# Altium PCB Current_Amplifier_PCB.PcbDoc
Units mm, origin at the board's own origin, x right, y up, seen from the top; angles counter-clockwise.
Board outline 34 x 20.7 mm, 2 copper layers (Top Layer, Bottom Layer); 7 components, 19 nets, 49 pads, 3 vias.
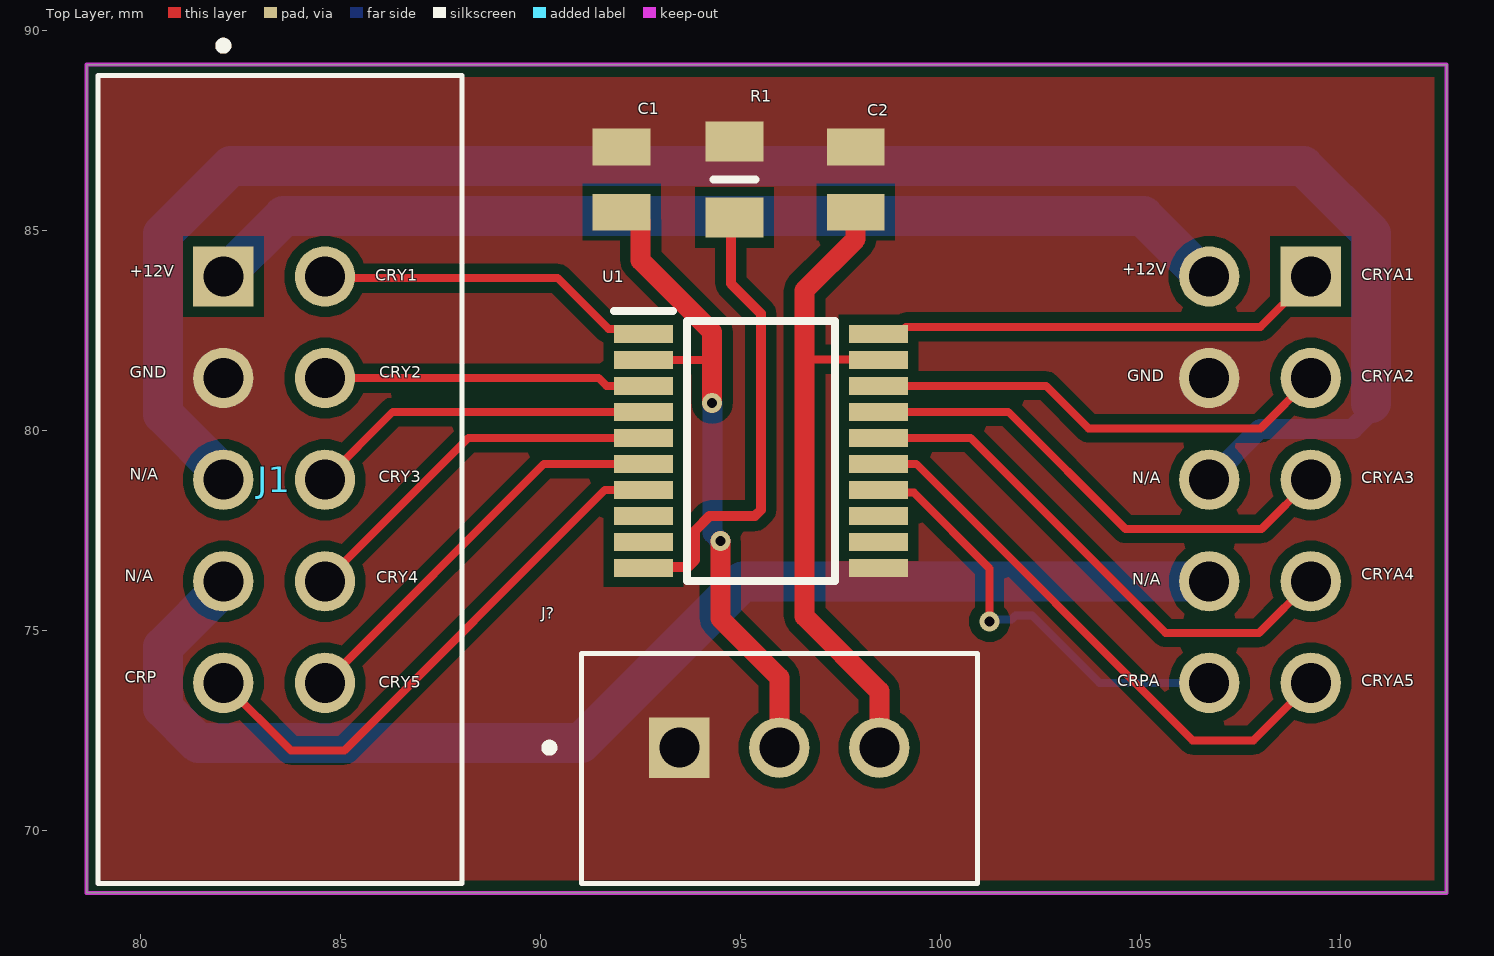
[diagram p0: Top Layer view]
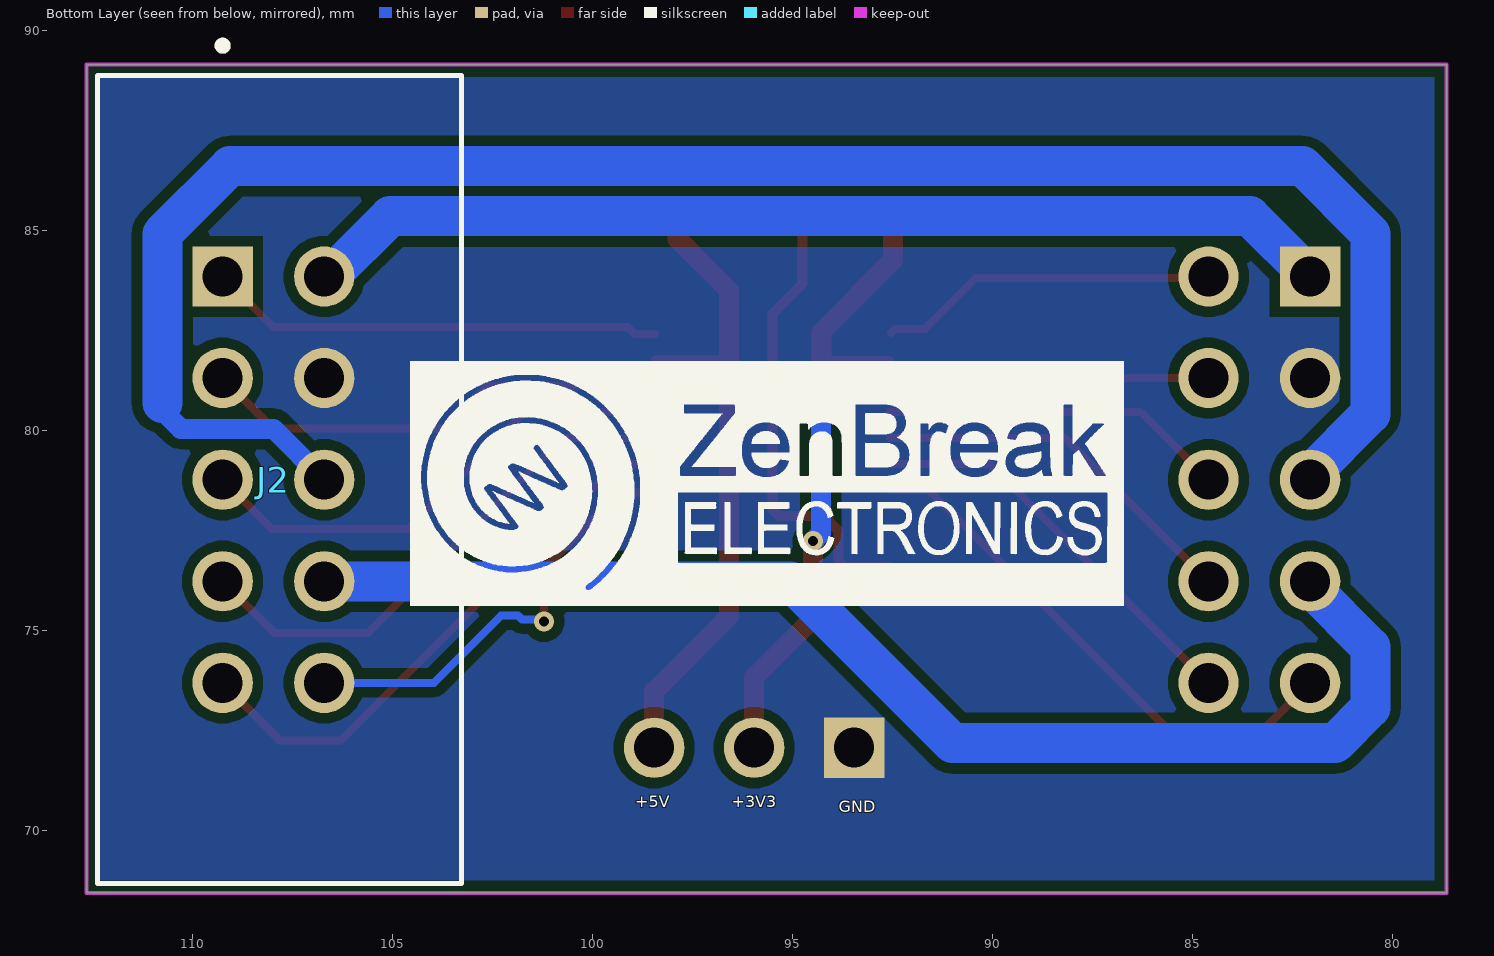
[diagram p1: Bottom Layer view, seen from below]
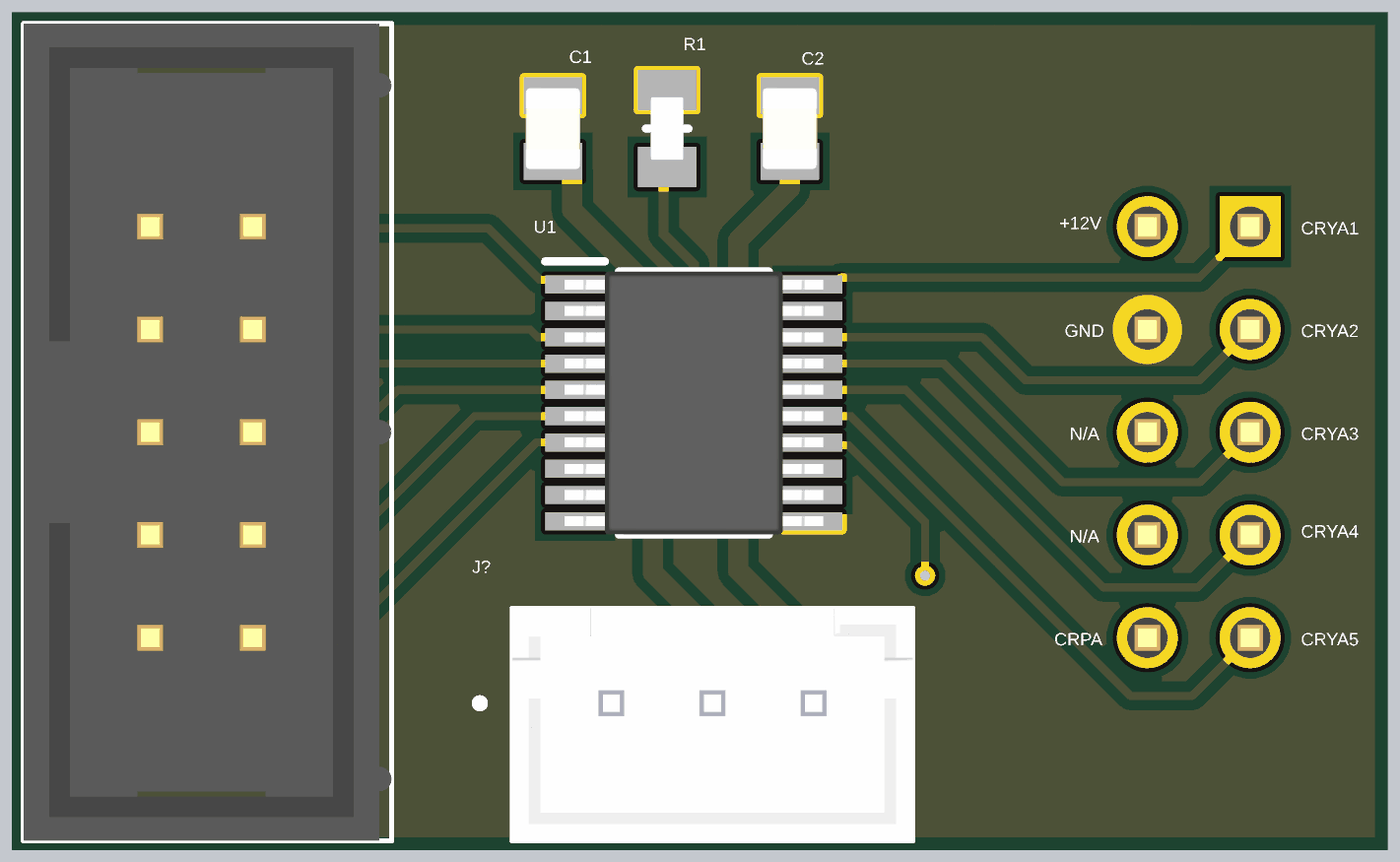
[diagram p2: 3D render of the assembled board from above, using the file's embedded part models]

## Layer stack, top to bottom
Top Solder: solder mask 0.0102, Solder Resist, Dk 3.5
Top Layer: signal copper 0.0356
Dielectric 1: dielectric 0.32, FR-4, Dk 4.8
Bottom Layer: signal copper 0.0356
Bottom Solder: solder mask 0.0102, Solder Resist, Dk 3.5

## Board outline
78.649,68.453 112.649,68.453 112.649,89.154 78.649,89.154

## Design rules (kind name [scope] priority, off if disabled: settings)
Clearance [All] p1: gap=0.254 ignorepadtopadclearanceinfootprint=TRUE except(0: Arc-Hole Track-Hole SMDPad-Hole THPad-Hole Via-Hole Fill-Hole Poly-Hole Region-Hole Text-Hole; 0.127: Arc-Text Track-Text SMDPad-Text THPad-Text Via-Text Fill-Text Poly-Text Region-Text Text-Text)
MinimumSolderMaskSliver [All] p1: minsoldermaskwidth=0.2
PolygonConnect [All] p1: connectstyle=Direct reliefconductorwidth=0.254 reliefentries=4 polygonreliefangle="90 Angle" airgapwidth=0.254
RoutingVias [All] p1: holewidth=0.711 width=1.27 viastyle="Through Hole" minholewidth=0.15 minwidth=0.25 maxholewidth=0.711 maxwidth=1.27
SilkToSilkClearance [All] p1: silktosilkclearance=0.127
SilkToSolderMaskClearance [IsPad] p1: minsilkscreentomaskgap=0.127 clearancetoexposedcopper=TRUE
SolderMaskExpansion [All] p1: expansion=0.102 istentingtop=FALSE
Width [All] p1: maxlimit=1 minlimit=0.127 preferedwidth=0.2 minimp=50.000000 maximp=50.000000 favimp=50.000000
27 further rules are at their usual default settings.

## Components (designator, comment, footprint, x,y, rotation, side; value= is the part's Value field where it differs from the comment)
C1 "0.1uF" CAPC2013X140N 92.022,86.284 r90 top
C2 "0.1uF" CAPC2013X140N 97.875,86.284 r90 top
J1 "SBH11-PBPC-D05-ST-BK" SULLINS_SBH11-PBPC-D05-ST-BK 83.335,78.78 r270 top
J2 "SBH11-PBPC-D05-ST-BK" SULLINS_SBH11-PBPC-D05-ST-BK 107.981,78.78 r270 bottom locked
J? "B3B-XH-A(LF)(SN)" JST_B3B-XH-A(LF)(SN) 95.964,71.555 r180 top locked
R1 "100" RESC2012X65N 94.844,86.284 r90 top
U1 "TXS0108EPWR" SOP65P640X120-20N 95.504,79.502 r0 top

## Footprints (in the part's own frame and the unit in brackets; to place one, negate y for a bottom-side part, rotate by r counter-clockwise, add the part's x,y. Pads: shape width x height; smd on the part's side, far side on the other; paste and mask are expansions set on the pad)
CAPC2013X140N [mil]
  rect 36x57 smd: 1(-32,0) 2(32,0)
  body extent -40,-27 40,27, height 49
JST_B3B-XH-A(LF)(SN) [mm]
  rect 1.508x1.508 / inner round 1.508 / far side rect 1.508x1.508 hole 1: 1(2.5,-0.525)
  round 1.508 hole 1: 2(0,-0.525) 3(-2.5,-0.525)
  silkscreen extent -4.95,-2.88 5.85,2.88, body extent -4.95,-2.88 4.95,2.88, height 7
RESC2012X65N [mm]
  rect 1x1.45 smd: 1(-0.95,0) 2(0.95,0)
  silkscreen extent 0,-0.53 0,0.53, body extent -0.77,-0.4 0.77,0.4, height 0.46
SOP65P640X120-20N [mm]
  rect 1.475x0.45 smd: 1(-2.938,2.925) 2(-2.938,2.275) 3(-2.938,1.625) 4(-2.938,0.975) 5(-2.938,0.325) 6(-2.938,-0.325) 7(-2.938,-0.975) 8(-2.938,-1.625) 9(-2.938,-2.275) 10(-2.938,-2.925) 11(2.938,-2.925) 12(2.938,-2.275) 13(2.938,-1.625) 14(2.938,-0.975) 15(2.938,-0.325) 16(2.938,0.325) 17(2.938,0.975) 18(2.938,1.625) 19(2.938,2.275) 20(2.938,2.925)
  silkscreen extent -3.67,-3.25 1.85,3.5, body extent -3.2,-3.25 3.2,3.25, height 1.13
SULLINS_SBH11-PBPC-D05-ST-BK [mm]
  rect 1.508x1.508 / inner round 1.508 / far side rect 1.508x1.508 hole 1: 1(-5.08,-1.27)
  round 1.508 hole 1: 2(-5.08,1.27) 3(-2.54,-1.27) 4(-2.54,1.27) 5(0,-1.27) 6(0,1.27) 7(2.54,-1.27) 8(2.54,1.27) 9(5.08,-1.27) 10(5.08,1.27)
  silkscreen extent -10.95,-4.4 10.1,4.7, body extent -10.1,-4.39 10.1,4.7, height 9.09

## Part data
C1 C2: library part 08053C474JAT2A, "Capacitor", Manufacturer_Name="Kyocera AVX", Mouser Part Number=581-08053C474JAT2A, Manufacturer_Part_Number=08053C474JAT2A, Mouser Price/Stock=https://www.mouser.co.uk/ProductDetail/KYOCERA-AVX/08053C474JAT2A?qs=bb%252B1MDm7h6L8wnHciIrwGg%3D%3D
J1 J2: "10 Position Total Dual Row 2.54 mm Pitch Straight Male Shrouded Box Header", Package=None, Check_prices=https://www.snapeda.com/parts/SBH11-PBPC-D05-ST-BK/Sullins+Connector+Solutions/view-part/?ref=eda, MF="Sullins Connector", MP=SBH11-PBPC-D05-ST-BK, SnapEDA_Link=https://www.snapeda.com/parts/SBH11-PBPC-D05-ST-BK/Sullins+Connector+Solutions/view-part/?ref=snap
J?: "Connector Header Through Hole 3 position 0.098 (2.50mm)", Package=None, Check_prices=https://www.snapeda.com/parts/B3B-XH-A(LF)(SN)/JST+Sales+America+Inc./view-part/?ref=eda, MF="JST Sales", MP=B3B-XH-A(LF)(SN), SnapEDA_Link=https://www.snapeda.com/parts/B3B-XH-A(LF)(SN)/JST+Sales+America+Inc./view-part/?ref=snap
R1: library part CPF0805B102RE1, "Resistor", Manufacturer_Name="TE Connectivity", Datasheet Link=http://docs-europe.electrocomponents.com/webdocs/13d1/0900766b813d116f.pdf, Height=0.65mm, Manufacturer_Part_Number=CPF0805B102RE1
U1: "8-bit bidirectional voltage-level shifter for open-drain and push-pull application", Package="TSSOP-20 Texas Instruments", Availability="In Stock", Check_prices=https://www.snapeda.com/parts/TXS0108EPWR/Texas+Instruments/view-part/?ref=eda, MF="Texas Instruments", MP=TXS0108EPWR, Price=None, Purchase-URL=https://pricing.snapeda.com/search/part/TXS0108EPWR/?ref=eda, SnapEDA_Link=https://www.snapeda.com/parts/TXS0108EPWR/Texas+Instruments/view-part/?ref=snap

## Via types
v1: diameter 0.5, hole 0.25, Top Layer to Bottom Layer, 3 vias

## Nets (pads, with @x,y where several pads share a name; then routed paths per layer and width w, separated by ;. In a path a pad name is that pad's centre, name@x,y a point inside that pad or via, vN(x,y) a via of type N, cw(c..) or ccw(c..) an arc to the next point about the centre after c; other vN are vias at no path point)
+3v3: C1.1 J?.2 U1.2 | length 16.9
  Top Layer w0.2: U1.2 94.27,81.777
  Top Layer w0.5: C1.1@92.022,85.547 92.213,85.547 92.496,85.264 92.496,84.264 94.285,82.475 v1(94.285,80.693) ; v1(94.488,77.244) 94.488,75.311 95.964,73.835 J?.2
  Bottom Layer w0.5: v1@94.294,80.712 94.294,77.438 v1(94.488,77.244)
+5: C2.1 J?.3 U1.19 | length 16.7
  Top Layer w0.2: 96.594,81.862 96.669,81.788 U1.19@98.442,81.788
  Top Layer w0.5: C2.1@97.875,85.547 97.875,84.794 96.594,83.513 96.594,81.862 96.594,75.364 98.464,73.494 J?.3
+12: J1.1 J2.2 | length 25.9
  Bottom Layer w1: J1.1 83.573,85.368 105.066,85.368 106.574,83.86 J2.2
CRP: J1.9 U1.7 | length 13.9
  Top Layer w0.2: J1.9 83.755,72.009 85.09,72.009 91.608,78.527 U1.7
CRPA: J2.10 U1.14 | length 11.2
  Top Layer w0.2: U1.14 98.513,78.456 99.326,78.456 101.219,76.563 v1(101.219,75.236)
  Bottom Layer w0.2: v1(101.219,75.236) 101.269,75.286 101.769,75.286 101.869,75.386 102.287,75.386 103.973,73.7 J2.10
CRY1: J1.2 U1.1 | length 8.5
  Top Layer w0.2: J1.2 84.644,83.82 90.424,83.82 91.698,82.546 92.447,82.546 U1.1@92.547,82.447
CRY2: J1.4 U1.3 | length 8
  Top Layer w0.2: J1.4 91.449,81.32 91.642,81.127 U1.3
CRY3: J1.6 U1.4 | length 8.7
  Top Layer w0.2: J1.6 86.302,80.477 U1.4
CRY4: J1.8 U1.5 | length 9.4
  Top Layer w0.2: J1.8 88.192,79.827 U1.5
CRY5: J1.10 U1.6 | length 10.2
  Top Layer w0.2: J1.10 90.082,79.177 U1.6
CRYA1: J2.1 U1.20 | length 11.4
  Top Layer w0.2: U1.20 98.955,82.427 99.128,82.601 107.992,82.601 J2.1
CRYA2: J2.3 U1.18 | length 11.8
  Top Layer w0.2: U1.18 102.632,81.127 103.698,80.061 107.992,80.061 J2.3
CRYA3: J2.5 U1.17 | length 12.5
  Top Layer w0.2: U1.17 101.687,80.477 104.618,77.546 108.018,77.546 J2.5
CRYA4: J2.7 U1.16 | length 13.4
  Top Layer w0.2: U1.16 100.742,79.827 105.623,74.946 107.958,74.946 J2.7
CRYA5: J2.9 U1.15 | length 14.3
  Top Layer w0.2: U1.15 99.385,79.177 106.299,72.263 107.815,72.263 J2.9
GND: C1.2 C2.2 J1.3 J2.4 J?.1 R1.2 U1.11
LRP: J1.5 J2.6 | length 47.3
  Bottom Layer w0.5: J2.6 107.981,80.05 110.301,80.05 110.693,80.442
  Bottom Layer w1: J1.5 82.065,78.917 80.557,80.425 80.557,84.926 82.252,86.622 109.064,86.622 110.759,84.926 110.759,80.695
N: J1.7 J2.8 | length 32
  Bottom Layer w1: J1.7 82.065,76.102 80.557,74.594 80.557,73.075 81.44,72.192 91.002,72.192 95.049,76.24 J2.8
NetR1_1: R1.1 U1.10 | length 11.3
  Top Layer w0.254: U1.10@92.574,76.596 93.685,76.596 93.857,76.769 93.857,77.505 94.227,77.875 95.355,77.875 95.504,78.024 95.504,82.931 94.754,83.681 R1.1@94.754,85.057
pads on no net: U1.8 U1.9 U1.12 U1.13

## Polygon pours and split planes (outlines as drawn)
GND on Bottom Layer "NONET_L-01_P-001" (solid, pour order 0): 112.598,89.129 112.649,89.078 112.649,68.504 78.715,68.504 78.715,89.103
GND on Top Layer "NONET_L-01_P-001" (solid, pour order 1): 112.598,89.129 112.598,68.504 112.573,68.529 78.715,68.529 78.715,89.103

## Keep-outs
Keep-Out Layer:
  the board outline again, w0.1

## Silkscreen, mask and mechanical layers (free items; w line width, h text height)
Top Overlay:
  text "+12V" at 104.538,83.797 h0.5
  text "+12V" at 79.726,83.757 h0.5
  text "CRY1" at 85.868,83.656 h0.5
  text "CRYA1" at 110.507,83.67 h0.5
  text "GND" at 79.726,81.223 h0.5
  text "CRY2" at 85.962,81.228 h0.5
  text "GND" at 104.665,81.136 h0.5
  text "CRYA2" at 110.507,81.13 h0.5
  text "N/A" at 79.726,78.683 h0.5
  text "CRY3" at 85.946,78.618 h0.5
  text "N/A" at 104.792,78.59 h0.5
  text "CRYA3" at 110.507,78.59 h0.5
  text "CRYA4" at 110.507,76.177 h0.5
  text "N/A" at 79.599,76.143 h0.5
  text "CRY4" at 85.883,76.101 h0.5
  text "N/A" at 104.792,76.056 h0.5
  text "CRP" at 79.599,73.603 h0.5
  text "CRPA" at 104.411,73.51 h0.5
  text "CRYA5" at 110.507,73.51 h0.5
  text "CRY5" at 85.949,73.476 h0.5
Bottom Overlay:
  drawing of 17 lines, arcs and shapes, not listed
  text "+3V3" at 96.52,70.49 h0.5
  text "+5V" at 98.933,70.49 h0.5
  text "GND" at 93.853,70.363 h0.5